# Altium PCB led_2835_rectangle_49point9X2point6cm.PcbDoc
Units mm, origin at the board's own origin, x right, y up, seen from the top; angles counter-clockwise.
Board outline 499 x 26 mm, 2 copper layers (Top Layer, Bottom Layer); 122 components, 96 nets, 244 pads, 0 vias.
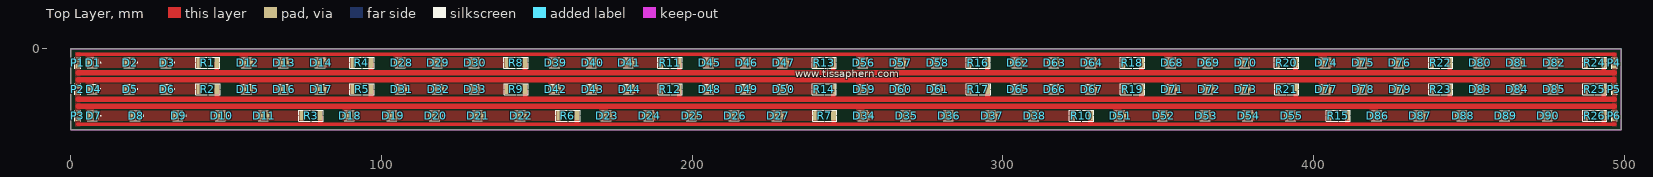
[diagram p0: Top Layer view]
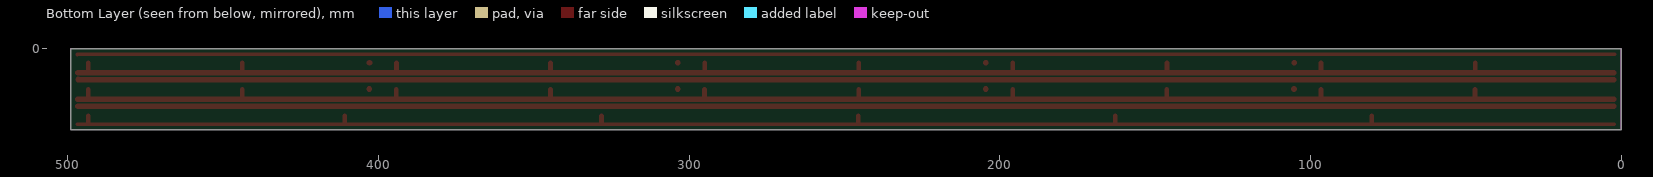
[diagram p1: Bottom Layer view, seen from below]

## Layer stack, top to bottom
Top Solder: solder mask 0.0102, Solder Resist, Dk 3.5
Top Layer: signal copper 0.0356
Dielectric 1: dielectric 0.32, FR-4, Dk 4.8
Bottom Layer: signal copper 0.0356
Bottom Solder: solder mask 0.0102, Solder Resist, Dk 3.5

## Board outline
0,-26 499,-26 499,0 0,0

## Design rules (kind name [scope] priority, off if disabled: settings)
Clearance [All] p1: gap=0.254 ignorepadtopadclearanceinfootprint=FALSE except(0: Arc-Hole Track-Hole SMDPad-Hole THPad-Hole Via-Hole Fill-Hole Poly-Hole Region-Hole Text-Hole)
PolygonConnect PolygonConnect_1 [All vs IsNamedPolygon('NONET_L-01_P-001')] p1: connectstyle=Direct reliefconductorwidth=0.254 reliefentries=4 polygonreliefangle="90 Angle" airgapwidth=0.254
PolygonConnect [All] p2: connectstyle=Relief reliefconductorwidth=0.254 reliefentries=4 polygonreliefangle="90 Angle" airgapwidth=0.254
RoutingVias [All] p1: holewidth=0.711 width=1.27 viastyle="Through Hole" minholewidth=0.711 minwidth=1.27 maxholewidth=0.711 maxwidth=1.27
SolderMaskExpansion [All] p1: expansion=0.102 istentingtop=FALSE
Width [All] p1: maxlimit=15 minlimit=0.254 preferedwidth=0.254
30 further rules are at their usual default settings.

## Components (designator, comment, footprint, x,y, rotation, side; value= is the part's Value field where it differs from the comment)
D1 "OF-SMD2835Y" LED_OF-SMD2835Y 4.49,-2.785 r180 top
D2 "OF-SMD2835Y" LED_OF-SMD2835Y 16.356,-2.785 r180 top
D3 "OF-SMD2835Y" LED_OF-SMD2835Y 28.222,-2.785 r180 top
D4 "OF-SMD2835Y" LED_OF-SMD2835Y 4.528,-11.253 r180 top
D5 "OF-SMD2835Y" LED_OF-SMD2835Y 16.394,-11.253 r180 top
D6 "OF-SMD2835Y" LED_OF-SMD2835Y 28.26,-11.253 r180 top
D7 "OF-SMD2835Y" LED_OF-SMD2835Y 4.553,-19.864 r180 top
D8 "OF-SMD2835Y" LED_OF-SMD2835Y 18.285,-19.864 r180 top
D9 "OF-SMD2835Y" LED_OF-SMD2835Y 32.017,-19.864 r180 top
D10 "OF-SMD2835Y" LED_OF-SMD2835Y 45.749,-19.864 r180 top
D11 "OF-SMD2835Y" LED_OF-SMD2835Y 59.535,-19.864 r180 top
D12 "OF-SMD2835Y" LED_OF-SMD2835Y 54.09,-2.785 r180 top
D13 "OF-SMD2835Y" LED_OF-SMD2835Y 65.956,-2.785 r180 top
D14 "OF-SMD2835Y" LED_OF-SMD2835Y 77.822,-2.785 r180 top
D15 "OF-SMD2835Y" LED_OF-SMD2835Y 54.128,-11.253 r180 top
D16 "OF-SMD2835Y" LED_OF-SMD2835Y 65.994,-11.253 r180 top
D17 "OF-SMD2835Y" LED_OF-SMD2835Y 77.86,-11.253 r180 top
D18 "OF-SMD2835Y" LED_OF-SMD2835Y 87.213,-19.864 r180 top
D19 "OF-SMD2835Y" LED_OF-SMD2835Y 100.945,-19.864 r180 top
D20 "OF-SMD2835Y" LED_OF-SMD2835Y 114.677,-19.864 r180 top
D21 "OF-SMD2835Y" LED_OF-SMD2835Y 128.409,-19.864 r180 top
D22 "OF-SMD2835Y" LED_OF-SMD2835Y 142.195,-19.864 r180 top
D23 "OF-SMD2835Y" LED_OF-SMD2835Y 169.873,-19.864 r180 top
D24 "OF-SMD2835Y" LED_OF-SMD2835Y 183.605,-19.864 r180 top
D25 "OF-SMD2835Y" LED_OF-SMD2835Y 197.337,-19.864 r180 top
D26 "OF-SMD2835Y" LED_OF-SMD2835Y 211.069,-19.864 r180 top
D27 "OF-SMD2835Y" LED_OF-SMD2835Y 224.855,-19.864 r180 top
D28 "OF-SMD2835Y" LED_OF-SMD2835Y 103.69,-2.785 r180 top
D29 "OF-SMD2835Y" LED_OF-SMD2835Y 115.556,-2.785 r180 top
D30 "OF-SMD2835Y" LED_OF-SMD2835Y 127.422,-2.785 r180 top
D31 "OF-SMD2835Y" LED_OF-SMD2835Y 103.728,-11.253 r180 top
D32 "OF-SMD2835Y" LED_OF-SMD2835Y 115.594,-11.253 r180 top
D33 "OF-SMD2835Y" LED_OF-SMD2835Y 127.46,-11.253 r180 top
D34 "OF-SMD2835Y" LED_OF-SMD2835Y 252.533,-19.864 r180 top
D35 "OF-SMD2835Y" LED_OF-SMD2835Y 266.265,-19.864 r180 top
D36 "OF-SMD2835Y" LED_OF-SMD2835Y 279.997,-19.864 r180 top
D37 "OF-SMD2835Y" LED_OF-SMD2835Y 293.729,-19.864 r180 top
D38 "OF-SMD2835Y" LED_OF-SMD2835Y 307.515,-19.864 r180 top
D39 "OF-SMD2835Y" LED_OF-SMD2835Y 153.29,-2.785 r180 top
D40 "OF-SMD2835Y" LED_OF-SMD2835Y 165.156,-2.785 r180 top
D41 "OF-SMD2835Y" LED_OF-SMD2835Y 177.022,-2.785 r180 top
D42 "OF-SMD2835Y" LED_OF-SMD2835Y 153.328,-11.253 r180 top
D43 "OF-SMD2835Y" LED_OF-SMD2835Y 165.194,-11.253 r180 top
D44 "OF-SMD2835Y" LED_OF-SMD2835Y 177.06,-11.253 r180 top
D45 "OF-SMD2835Y" LED_OF-SMD2835Y 202.89,-2.785 r180 top
D46 "OF-SMD2835Y" LED_OF-SMD2835Y 214.756,-2.785 r180 top
D47 "OF-SMD2835Y" LED_OF-SMD2835Y 226.622,-2.785 r180 top
D48 "OF-SMD2835Y" LED_OF-SMD2835Y 202.928,-11.253 r180 top
D49 "OF-SMD2835Y" LED_OF-SMD2835Y 214.794,-11.253 r180 top
D50 "OF-SMD2835Y" LED_OF-SMD2835Y 226.66,-11.253 r180 top
D51 "OF-SMD2835Y" LED_OF-SMD2835Y 335.193,-19.864 r180 top
D52 "OF-SMD2835Y" LED_OF-SMD2835Y 348.925,-19.864 r180 top
D53 "OF-SMD2835Y" LED_OF-SMD2835Y 362.657,-19.864 r180 top
D54 "OF-SMD2835Y" LED_OF-SMD2835Y 376.389,-19.864 r180 top
D55 "OF-SMD2835Y" LED_OF-SMD2835Y 390.175,-19.864 r180 top
D56 "OF-SMD2835Y" LED_OF-SMD2835Y 252.49,-2.785 r180 top
D57 "OF-SMD2835Y" LED_OF-SMD2835Y 264.356,-2.785 r180 top
D58 "OF-SMD2835Y" LED_OF-SMD2835Y 276.222,-2.785 r180 top
D59 "OF-SMD2835Y" LED_OF-SMD2835Y 252.528,-11.253 r180 top
D60 "OF-SMD2835Y" LED_OF-SMD2835Y 264.394,-11.253 r180 top
D61 "OF-SMD2835Y" LED_OF-SMD2835Y 276.26,-11.253 r180 top
D62 "OF-SMD2835Y" LED_OF-SMD2835Y 302.09,-2.785 r180 top
D63 "OF-SMD2835Y" LED_OF-SMD2835Y 313.956,-2.785 r180 top
D64 "OF-SMD2835Y" LED_OF-SMD2835Y 325.822,-2.785 r180 top
D65 "OF-SMD2835Y" LED_OF-SMD2835Y 302.128,-11.253 r180 top
D66 "OF-SMD2835Y" LED_OF-SMD2835Y 313.994,-11.253 r180 top
D67 "OF-SMD2835Y" LED_OF-SMD2835Y 325.86,-11.253 r180 top
D68 "OF-SMD2835Y" LED_OF-SMD2835Y 351.69,-2.785 r180 top
D69 "OF-SMD2835Y" LED_OF-SMD2835Y 363.556,-2.785 r180 top
D70 "OF-SMD2835Y" LED_OF-SMD2835Y 375.422,-2.785 r180 top
D71 "OF-SMD2835Y" LED_OF-SMD2835Y 351.728,-11.253 r180 top
D72 "OF-SMD2835Y" LED_OF-SMD2835Y 363.594,-11.253 r180 top
D73 "OF-SMD2835Y" LED_OF-SMD2835Y 375.46,-11.253 r180 top
D74 "OF-SMD2835Y" LED_OF-SMD2835Y 401.29,-2.785 r180 top
D75 "OF-SMD2835Y" LED_OF-SMD2835Y 413.156,-2.785 r180 top
D76 "OF-SMD2835Y" LED_OF-SMD2835Y 425.022,-2.785 r180 top
D77 "OF-SMD2835Y" LED_OF-SMD2835Y 401.328,-11.253 r180 top
D78 "OF-SMD2835Y" LED_OF-SMD2835Y 413.194,-11.253 r180 top
D79 "OF-SMD2835Y" LED_OF-SMD2835Y 425.06,-11.253 r180 top
D80 "OF-SMD2835Y" LED_OF-SMD2835Y 450.89,-2.785 r180 top
D81 "OF-SMD2835Y" LED_OF-SMD2835Y 462.756,-2.785 r180 top
D82 "OF-SMD2835Y" LED_OF-SMD2835Y 474.622,-2.785 r180 top
D83 "OF-SMD2835Y" LED_OF-SMD2835Y 450.928,-11.253 r180 top
D84 "OF-SMD2835Y" LED_OF-SMD2835Y 462.794,-11.253 r180 top
D85 "OF-SMD2835Y" LED_OF-SMD2835Y 474.66,-11.253 r180 top
D86 "OF-SMD2835Y" LED_OF-SMD2835Y 417.853,-19.864 r180 top
D87 "OF-SMD2835Y" LED_OF-SMD2835Y 431.585,-19.864 r180 top
D88 "OF-SMD2835Y" LED_OF-SMD2835Y 445.317,-19.864 r180 top
D89 "OF-SMD2835Y" LED_OF-SMD2835Y 459.049,-19.864 r180 top
D90 "OF-SMD2835Y" LED_OF-SMD2835Y 472.835,-19.864 r180 top
P1 "Header 2" HDR1X2_SMD 2.268,-4.55 r270 top
P2 "Header 2" HDR1X2_SMD 2.268,-13.018 r270 top
P3 "Header 2" HDR1X2_SMD 2.268,-21.58 r270 top
P4 "Header 2" HDR1X2_SMD 496.837,-4.55 r270 top
P5 "Header 2" HDR1X2_SMD 496.837,-13.018 r270 top
P6 "Header 2" HDR1X2_SMD 496.837,-21.558 r270 top
R1 "1K" R2512 40.088,-4.504 r0 top
R2 "1K" R2512 40.126,-12.972 r0 top
R3 "1K" R2512 73.327,-21.539 r0 top
R4 "1K" R2512 89.688,-4.504 r0 top
R5 "1K" R2512 89.726,-12.972 r0 top
R6 "1K" R2512 155.987,-21.539 r0 top
R7 "1K" R2512 238.647,-21.539 r0 top
R8 "1K" R2512 139.288,-4.504 r0 top
R9 "1K" R2512 139.326,-12.972 r0 top
R10 "1K" R2512 321.307,-21.539 r0 top
R11 "1K" R2512 188.888,-4.504 r0 top
R12 "1K" R2512 188.926,-12.972 r0 top
R13 "1K" R2512 238.488,-4.504 r0 top
R14 "1K" R2512 238.526,-12.972 r0 top
R15 "1K" R2512 403.967,-21.539 r0 top
R16 "1K" R2512 288.088,-4.504 r0 top
R17 "1K" R2512 288.126,-12.972 r0 top
R18 "1K" R2512 337.688,-4.504 r0 top
R19 "1K" R2512 337.726,-12.972 r0 top
R20 "1K" R2512 387.288,-4.504 r0 top
R21 "1K" R2512 387.326,-12.972 r0 top
R22 "1K" R2512 436.888,-4.504 r0 top
R23 "1K" R2512 436.926,-12.972 r0 top
R24 "1K" R2512 486.488,-4.504 r0 top
R25 "1K" R2512 486.526,-12.972 r0 top
R26 "1K" R2512 486.526,-21.539 r0 top

## Footprints (in the part's own frame and the unit in brackets; to place one, negate y for a bottom-side part, rotate by r counter-clockwise, add the part's x,y. Pads: shape width x height; smd on the part's side, far side on the other; paste and mask are expansions set on the pad)
HDR1X2_SMD [mm] "Connector; Header; 2 Position"
  rect 1.5x1.5 smd: GND(0.955,0.004) VCC(-0.955,-0.004)
  silkscreen extent -1.81,-0.94 1.81,0.94
LED_OF-SMD2835Y [mm]
  rect 2.6x2.55 smd: A(-1.575,1.675)
  rect 1x2.55 smd: C(-3.975,1.675)
  silkscreen extent -5.18,0.08 -0.73,3.27
R2512 [mm] "CHIP RESISTOR 1 WATT, 6.4X3.2mm, 2512, 6432"
  rrect50% 1.6x3.2 smd: 1(1.1,0) 2(6.9,0)
  Top Layer pour cut-out: 1.6,1.9 6.4,1.9 6.4,-1.9 1.6,-1.9
  silkscreen extent 0.1,-1.8 7.9,1.8, body extent 0.83,-1.5 7.18,1.5, height 1.6

## Part data
D1 D2 D3 D4 D5 D6 D7 D8 D9 D10 D11 D12 D13 D14 D15 D16 D17 D18 D19 D20 D21 D22 D23 D24 D25 D26 D27 D28 D29 D30 D31 D32 D33 D34 D35 D36 D37 D38 D39 D40 D41 D42 D43 D44 D45 D46 D47 D48 D49 D50 D51 D52 D53 D54 D55 D56 D57 D58 D59 D60 D61 D62 D63 D64 D65 D66 D67 D68 D69 D70 D71 D72 D73 D74 D75 D76 D77 D78 D79 D80 D81 D82 D83 D84 D85 D86 D87 D88 D89 D90: "LED; SMD; 2835, PLCC2; yellow; 2200-2800mcd; 2.8x3.5x0.75mm; 120Â°", Package=None, Availability=Unavailable, MP=OF-SMD2835Y, Price=None
P1 P2 P3 P4 P5 P6: "Header, 2-Pin", LatestRevisionDate=17-Jul-2002, LatestRevisionNote="Re-released for DXP Platform.", Publisher="Altium Limited"
R1 R2 R3 R4 R5 R6 R7 R8 R9 R10 R11 R12 R13 R14 R15 R16 R17 R18 R19 R20 R21 R22 R23 R24 R25 R26: library part Res1, "Resistor", LatestRevisionDate=17-Jul-2002, LatestRevisionNote="Re-released for DXP Platform.", PackageDescription="Axial Device, Thru-Hole; 2 Leads; 0.3 in Pin Spacing", PackageReference=AXIAL-0.3, Published=8-Jun-2000, Publisher="Altium Limited"

## Nets (pads, with @x,y where several pads share a name; then routed paths per layer and width w, separated by ;. In a path a pad name is that pad's centre, name@x,y a point inside that pad or via, vN(x,y) a via of type N, cw(c..) or ccw(c..) an arc to the next point about the centre after c; other vN are vias at no path point)
FIRST_GND: P1.GND P4.GND R1.2 R4.2 R8.2 R11.2 R13.2 R16.2 R18.2 R20.2 R22.2 R24.2 | length 526.2
  Top Layer w1.5: 46.988,-7.696 R1.2 ; 96.588,-7.696 R4.2 ; 146.188,-7.696 R8.2 ; 195.788,-7.696 R11.2 ; 245.388,-7.696 R13.2 ; 294.988,-7.696 R16.2 ; 344.588,-7.696 R18.2 ; 394.188,-7.696 R20.2 ; R22.2 443.788,-7.696 443.796,-7.704 ; 493.388,-7.696 R24.2
  Top Layer w1.8: 2.415,-7.704 41.786,-7.704 443.796,-7.704 496.704,-7.704 496.704,-7.71
FIRST_VCC: D1.A D12.A D28.A D39.A D45.A D56.A D62.A D68.A D74.A D80.A P1.VCC P4.VCC | length 494.9
  Top Layer w1.2: 2.148,-1.731 496.954,-1.84
  Top Layer w1.8: D28.A D28.A@105.28,-4.445 ; D45.A D45.A@204.48,-4.445 ; D62.A D62.A@303.68,-4.445 ; D74.A D74.A@402.88,-4.445
NetD1_C: D1.C D2.A
NetD2_C: D2.C D3.A
NetD3_C: D3.C R1.1
NetD4_C: D4.C D5.A
NetD5_C: D5.C D6.A
NetD6_C: D6.C R2.1
NetD7_C: D7.C D8.A
NetD8_C: D8.C D9.A
NetD9_C: D9.C D10.A
NetD10_C: D10.C D11.A
NetD11_C: D11.C R3.1
NetD12_C: D12.C D13.A
NetD13_C: D13.C D14.A
NetD14_C: D14.C R4.1
NetD15_C: D15.C D16.A
NetD16_C: D16.C D17.A
NetD17_C: D17.C R5.1
NetD18_C: D18.C D19.A
NetD19_C: D19.C D20.A
NetD20_C: D20.C D21.A
NetD21_C: D21.C D22.A
NetD22_C: D22.C R6.1
NetD23_C: D23.C D24.A
NetD24_C: D24.C D25.A
NetD25_C: D25.C D26.A
NetD26_C: D26.C D27.A
NetD27_C: D27.C R7.1
NetD28_C: D28.C D29.A
NetD29_C: D29.C D30.A
NetD30_C: D30.C R8.1
NetD31_C: D31.C D32.A
NetD32_C: D32.C D33.A
NetD33_C: D33.C R9.1
NetD34_C: D34.C D35.A
NetD35_C: D35.C D36.A
NetD36_C: D36.C D37.A
NetD37_C: D37.C D38.A
NetD38_C: D38.C R10.1
NetD39_C: D39.C D40.A
NetD40_C: D40.C D41.A
NetD41_C: D41.C R11.1
NetD42_C: D42.C D43.A
NetD43_C: D43.C D44.A
NetD44_C: D44.C R12.1
NetD45_C: D45.C D46.A
NetD46_C: D46.C D47.A
NetD47_C: D47.C R13.1
NetD48_C: D48.C D49.A
NetD49_C: D49.C D50.A
NetD50_C: D50.C R14.1
NetD51_C: D51.C D52.A
NetD52_C: D52.C D53.A
NetD53_C: D53.C D54.A
NetD54_C: D54.C D55.A
NetD55_C: D55.C R15.1
NetD56_C: D56.C D57.A
NetD57_C: D57.C D58.A
NetD58_C: D58.C R16.1
NetD59_C: D59.C D60.A
NetD60_C: D60.C D61.A
NetD61_C: D61.C R17.1
NetD62_C: D62.C D63.A
NetD63_C: D63.C D64.A
NetD64_C: D64.C R18.1
NetD65_C: D65.C D66.A
NetD66_C: D66.C D67.A
NetD67_C: D67.C R19.1
NetD68_C: D68.C D69.A
NetD69_C: D69.C D70.A
NetD70_C: D70.C R20.1
NetD71_C: D71.C D72.A
NetD72_C: D72.C D73.A
NetD73_C: D73.C R21.1
NetD74_C: D74.C D75.A
NetD75_C: D75.C D76.A
NetD76_C: D76.C R22.1
NetD77_C: D77.C D78.A
NetD78_C: D78.C D79.A
NetD79_C: D79.C R23.1
NetD80_C: D80.C D81.A
NetD81_C: D81.C D82.A
NetD82_C: D82.C R24.1
NetD83_C: D83.C D84.A
NetD84_C: D84.C D85.A
NetD85_C: D85.C R25.1
NetD86_C: D86.C D87.A
NetD87_C: D87.C D88.A
NetD88_C: D88.C D89.A
NetD89_C: D89.C D90.A
NetD90_C: D90.C R26.1
SECOND_GND: P2.GND P5.GND R2.2 R5.2 R9.2 R12.2 R14.2 R17.2 R19.2 R21.2 R23.2 R25.2 | length 526.2
  Top Layer w1.5: 47.026,-16.164 R2.2 ; 96.626,-16.164 R5.2 ; 146.226,-16.164 R9.2 ; 195.826,-16.164 R12.2 ; 245.426,-16.164 R14.2 ; 295.026,-16.164 R17.2 ; 344.626,-16.164 R19.2 ; 394.226,-16.164 R21.2 ; 443.826,-16.164 R23.2 ; 493.426,-16.164 R25.2
  Top Layer w1.8: 2.451,-16.255 47.026,-16.255 96.626,-16.255 146.226,-16.255 195.826,-16.255 245.426,-16.255 295.026,-16.255 344.626,-16.255 394.226,-16.255 443.826,-16.255 494.096,-16.255 496.722,-16.255
SECOND_VCC: D4.A D15.A D31.A D42.A D48.A D59.A D65.A D71.A D77.A D83.A P2.VCC P5.VCC | length 494.3
  Top Layer w1.8: 2.427,-9.911 496.664,-9.871 ; D31.A D31.A@105.318,-12.913 ; D48.A D48.A@204.518,-12.913 ; D65.A D65.A@303.718,-12.913 ; D77.A D77.A@402.918,-12.913
THIRD_GND: P3.GND P6.GND R3.2 R6.2 R7.2 R10.2 R15.2 R26.2 | length 509.7
  Top Layer w1.2: 2.192,-24.281 80.227,-24.281 162.887,-24.281 245.547,-24.281 328.207,-24.281 410.867,-24.281 493.426,-24.281 496.939,-24.281
  Top Layer w1.5: 80.227,-24.037 R3.2 ; 162.887,-24.037 R6.2 ; 245.547,-24.037 R7.2 ; 328.207,-24.037 R10.2 ; 410.867,-24.037 R15.2 ; 493.426,-24.037 R26.2
THIRD_VCC: D7.A D18.A D23.A D34.A D51.A D86.A P3.VCC P6.VCC | length 494.3
  Top Layer w1.8: 2.429,-18.441 496.682,-18.445

## Polygon pours and split planes (outlines as drawn)
THIRD_GND on Top Layer "NONET_L-01_P-001" (solid, remove dead copper, pour order 296): 497.615,-21.747 496.066,-21.747 496.066,-24.876 497.62,-24.876
THIRD_VCC on Top Layer "NONET_L-01_P-001" (solid, remove dead copper, pour order 295): 496.059,-21.369 497.608,-21.369 497.608,-17.549 496.053,-17.549
SECOND_GND on Top Layer "NONET_L-01_P-001" (solid, remove dead copper, pour order 294): 497.615,-13.207 496.066,-13.207 496.066,-17.153 497.621,-17.153
SECOND_VCC on Top Layer "NONET_L-01_P-001" (solid, remove dead copper, pour order 293): 496.059,-12.829 497.608,-12.829 497.608,-8.985 496.053,-8.985
FIRST_GND on Top Layer "NONET_L-01_P-001" (solid, remove dead copper, pour order 291): 497.615,-4.739 496.066,-4.739 496.066,-8.603 497.621,-8.603
FIRST_VCC on Top Layer "NONET_L-01_P-001" (solid, remove dead copper, pour order 292): 496.059,-4.361 497.608,-4.361 497.608,-1.251 496.827,-1.24 496.054,-1.251
FIRST_VCC on Top Layer "NONET_L-01_P-001" (solid, remove dead copper, pour order 286): 1.49,-4.371 3.039,-4.371 3.039,-1.135 1.485,-1.135
THIRD_GND on Top Layer "NONET_L-01_P-001" (solid, remove dead copper, pour order 290): 3.046,-21.788 1.497,-21.788 1.497,-24.877 3.051,-24.877
THIRD_VCC on Top Layer "NONET_L-01_P-001" (solid, remove dead copper, pour order 289): 1.49,-21.372 3.039,-21.372 3.039,-17.547 1.484,-17.547
SECOND_GND on Top Layer "NONET_L-01_P-001" (solid, remove dead copper, pour order 288): 3.046,-13.226 1.497,-13.226 1.497,-17.151 3.052,-17.151
SECOND_VCC on Top Layer "NONET_L-01_P-001" (solid, remove dead copper, pour order 287): 1.49,-12.81 3.039,-12.81 3.039,-9.015 1.484,-9.015
FIRST_GND on Top Layer "NONET_L-01_P-001" (solid, remove dead copper, pour order 285): 3.046,-4.671 1.497,-4.671 1.497,-8.603 3.052,-8.603
FIRST_VCC on Top Layer "NONET_L-01_P-001" (solid, remove dead copper, pour order 94): 203.174,-6.082 203.174,-1.741 205.784,-1.741 205.784,-6.093 203.185,-6.093
NetD90_C on Top Layer "NONET_L-01_P-001" (solid, remove dead copper, pour order 268): 476.311,-20.264 476.311,-19.868 488.227,-19.868 488.227,-23.199 476.319,-23.199 476.314,-23.194
NetD55_C on Top Layer "NONET_L-01_P-001" (solid, remove dead copper, pour order 266): 393.651,-20.264 393.651,-19.868 405.567,-19.868 405.567,-23.199 393.659,-23.199 393.654,-23.194
NetD38_C on Top Layer "NONET_L-01_P-001" (solid, remove dead copper, pour order 265): 310.991,-20.264 310.991,-19.868 322.907,-19.868 322.907,-23.199 310.999,-23.199 310.994,-23.194
NetD27_C on Top Layer "NONET_L-01_P-001" (solid, remove dead copper, pour order 264): 228.331,-20.264 228.331,-19.868 240.247,-19.868 240.247,-23.199 228.339,-23.199 228.334,-23.194
NetD22_C on Top Layer "NONET_L-01_P-001" (solid, remove dead copper, pour order 263): 145.671,-20.264 145.671,-19.868 157.587,-19.868 157.587,-23.199 145.679,-23.199 145.674,-23.194
NetD89_C on Top Layer "NONET_L-01_P-001" (solid, remove dead copper, pour order 261): 462.525,-20.264 462.525,-19.868 475.664,-19.868 475.664,-23.199 462.533,-23.199 462.528,-23.194
NetD88_C on Top Layer "NONET_L-01_P-001" (solid, remove dead copper, pour order 260): 448.793,-20.264 448.793,-19.868 461.932,-19.868 461.932,-23.199 448.801,-23.199 448.796,-23.194
NetD87_C on Top Layer "NONET_L-01_P-001" (solid, remove dead copper, pour order 259): 435.061,-20.264 435.061,-19.868 448.2,-19.868 448.2,-23.199 435.069,-23.199 435.064,-23.194
NetD86_C on Top Layer "NONET_L-01_P-001" (solid, remove dead copper, pour order 258): 421.329,-20.264 421.329,-19.868 434.468,-19.868 434.468,-23.199 421.337,-23.199 421.332,-23.194
NetD54_C on Top Layer "NONET_L-01_P-001" (solid, remove dead copper, pour order 257): 379.865,-20.264 379.865,-19.868 393.004,-19.868 393.004,-23.199 379.873,-23.199 379.868,-23.194
NetD53_C on Top Layer "NONET_L-01_P-001" (solid, remove dead copper, pour order 256): 366.133,-20.264 366.133,-19.868 379.272,-19.868 379.272,-23.199 366.141,-23.199 366.136,-23.194
NetD52_C on Top Layer "NONET_L-01_P-001" (solid, remove dead copper, pour order 255): 352.401,-20.264 352.401,-19.868 365.54,-19.868 365.54,-23.199 352.409,-23.199 352.404,-23.194
NetD51_C on Top Layer "NONET_L-01_P-001" (solid, remove dead copper, pour order 254): 338.669,-20.264 338.669,-19.868 351.808,-19.868 351.808,-23.199 338.677,-23.199 338.672,-23.194
NetD37_C on Top Layer "NONET_L-01_P-001" (solid, remove dead copper, pour order 253): 297.205,-20.264 297.205,-19.868 310.344,-19.868 310.344,-23.199 297.213,-23.199 297.208,-23.194
NetD36_C on Top Layer "NONET_L-01_P-001" (solid, remove dead copper, pour order 252): 283.473,-20.264 283.473,-19.868 296.612,-19.868 296.612,-23.199 283.481,-23.199 283.476,-23.194
NetD35_C on Top Layer "NONET_L-01_P-001" (solid, remove dead copper, pour order 251): 269.741,-20.264 269.741,-19.868 282.88,-19.868 282.88,-23.199 269.749,-23.199 269.744,-23.194
NetD34_C on Top Layer "NONET_L-01_P-001" (solid, remove dead copper, pour order 250): 256.009,-20.264 256.009,-19.868 269.148,-19.868 269.148,-23.199 256.017,-23.199 256.012,-23.194
NetD26_C on Top Layer "NONET_L-01_P-001" (solid, remove dead copper, pour order 249): 214.545,-20.264 214.545,-19.868 227.684,-19.868 227.684,-23.199 214.553,-23.199 214.548,-23.194
NetD25_C on Top Layer "NONET_L-01_P-001" (solid, remove dead copper, pour order 248): 200.813,-20.264 200.813,-19.868 213.952,-19.868 213.952,-23.199 200.821,-23.199 200.816,-23.194
NetD24_C on Top Layer "NONET_L-01_P-001" (solid, remove dead copper, pour order 247): 187.081,-20.264 187.081,-19.868 200.22,-19.868 200.22,-23.199 187.089,-23.199 187.084,-23.194
NetD23_C on Top Layer "NONET_L-01_P-001" (solid, remove dead copper, pour order 245): 173.349,-20.264 173.349,-19.868 186.488,-19.868 186.488,-23.199 173.357,-23.199 173.352,-23.194
NetD21_C on Top Layer "NONET_L-01_P-001" (solid, remove dead copper, pour order 244): 131.713,-20.375 131.713,-19.979 144.852,-19.979 144.852,-23.31 131.721,-23.31 131.716,-23.305
NetD20_C on Top Layer "NONET_L-01_P-001" (solid, remove dead copper, pour order 243): 118.153,-20.264 118.153,-19.868 131.292,-19.868 131.292,-23.199 118.161,-23.199 118.156,-23.194
NetD19_C on Top Layer "NONET_L-01_P-001" (solid, remove dead copper, pour order 242): 104.421,-20.264 104.421,-19.868 117.56,-19.868 117.56,-23.199 104.429,-23.199 104.424,-23.194
NetD18_C on Top Layer "NONET_L-01_P-001" (solid, remove dead copper, pour order 240): 90.689,-20.264 90.689,-19.868 103.828,-19.868 103.828,-23.199 90.697,-23.199 90.692,-23.194
THIRD_VCC on Top Layer "NONET_L-01_P-001" (solid, remove dead copper, pour order 228): 4.833,-21.764 4.838,-21.759 4.838,-18.23 7.421,-18.23 7.432,-18.241 7.432,-23.187 4.833,-23.187 4.822,-23.176
THIRD_VCC on Top Layer "NONET_L-01_P-001" (solid, remove dead copper, pour order 230): 87.493,-21.764 87.498,-21.759 87.498,-18.23 90.081,-18.23 90.092,-18.241 90.092,-23.187 87.493,-23.187 87.482,-23.176
THIRD_VCC on Top Layer "NONET_L-01_P-001" (solid, remove dead copper, pour order 231): 170.153,-21.764 170.158,-21.759 170.158,-18.23 172.741,-18.23 172.752,-18.241 172.752,-23.187 170.153,-23.187 170.142,-23.176
THIRD_VCC on Top Layer "NONET_L-01_P-001" (solid, remove dead copper, pour order 232): 252.813,-21.764 252.818,-21.759 252.818,-18.23 255.401,-18.23 255.412,-18.241 255.412,-23.187 252.813,-23.187 252.802,-23.176
THIRD_VCC on Top Layer "NONET_L-01_P-001" (solid, remove dead copper, pour order 233): 335.473,-21.764 335.478,-21.759 335.478,-18.23 338.061,-18.23 338.072,-18.241 338.072,-23.187 335.473,-23.187 335.462,-23.176
THIRD_VCC on Top Layer "NONET_L-01_P-001" (solid, remove dead copper, pour order 234): 418.133,-21.764 418.138,-21.759 418.138,-18.23 420.721,-18.23 420.732,-18.241 420.732,-23.187 418.133,-23.187 418.122,-23.176
NetD7_C on Top Layer "NONET_L-01_P-001" (solid, remove dead copper, pour order 235): 8.029,-20.264 8.029,-19.868 21.168,-19.868 21.168,-23.199 8.037,-23.199 8.032,-23.194
NetD8_C on Top Layer "NONET_L-01_P-001" (solid, remove dead copper, pour order 236): 21.761,-20.264 21.761,-19.868 34.9,-19.868 34.9,-23.199 21.769,-23.199 21.764,-23.194
NetD9_C on Top Layer "NONET_L-01_P-001" (solid, remove dead copper, pour order 237): 35.493,-20.264 35.493,-19.868 48.632,-19.868 48.632,-23.199 35.501,-23.199 35.496,-23.194
NetD10_C on Top Layer "NONET_L-01_P-001" (solid, remove dead copper, pour order 238): 49.225,-20.264 49.225,-19.868 62.364,-19.868 62.364,-23.199 49.233,-23.199 49.228,-23.194
NetD11_C on Top Layer "NONET_L-01_P-001" (solid, remove dead copper, pour order 239): 63.011,-20.264 63.011,-19.868 74.927,-19.868 74.927,-23.199 63.019,-23.199 63.014,-23.194
SECOND_VCC on Top Layer "NONET_L-01_P-001" (solid, remove dead copper, pour order 225): 451.208,-13.153 451.213,-13.148 451.213,-9.619 453.796,-9.619 453.807,-9.63 453.807,-14.576 451.208,-14.576 451.197,-14.565
SECOND_VCC on Top Layer "NONET_L-01_P-001" (solid, remove dead copper, pour order 224): 401.623,-13.138 401.628,-13.133 401.628,-9.604 404.211,-9.604 404.222,-9.615 404.222,-14.561 401.623,-14.561 401.612,-14.55
SECOND_VCC on Top Layer "NONET_L-01_P-001" (solid, remove dead copper, pour order 223): 352.008,-13.153 352.013,-13.148 352.013,-9.619 354.596,-9.619 354.607,-9.63 354.607,-14.576 352.008,-14.576 351.997,-14.565
SECOND_VCC on Top Layer "NONET_L-01_P-001" (solid, remove dead copper, pour order 222): 302.408,-13.153 302.413,-13.148 302.413,-9.619 304.996,-9.619 305.007,-9.63 305.007,-14.576 302.408,-14.576 302.397,-14.565
SECOND_VCC on Top Layer "NONET_L-01_P-001" (solid, remove dead copper, pour order 221): 252.808,-13.153 252.813,-13.148 252.813,-9.619 255.396,-9.619 255.407,-9.63 255.407,-14.576 252.808,-14.576 252.797,-14.565
SECOND_VCC on Top Layer "NONET_L-01_P-001" (solid, remove dead copper, pour order 220): 203.223,-13.138 203.228,-13.133 203.228,-9.604 205.811,-9.604 205.822,-9.615 205.822,-14.561 203.223,-14.561 203.212,-14.55
SECOND_VCC on Top Layer "NONET_L-01_P-001" (solid, remove dead copper, pour order 219): 153.608,-13.153 153.613,-13.148 153.613,-9.619 156.196,-9.619 156.207,-9.63 156.207,-14.576 153.608,-14.576 153.597,-14.565
SECOND_VCC on Top Layer "NONET_L-01_P-001" (solid, remove dead copper, pour order 218): 104.023,-13.138 104.028,-13.133 104.028,-9.604 106.611,-9.604 106.622,-9.615 106.622,-14.561 104.023,-14.561 104.012,-14.55
SECOND_VCC on Top Layer "NONET_L-01_P-001" (solid, remove dead copper, pour order 217): 54.408,-13.153 54.413,-13.148 54.413,-9.619 56.996,-9.619 57.007,-9.63 57.007,-14.576 54.408,-14.576 54.397,-14.565
SECOND_VCC on Top Layer "NONET_L-01_P-001" (solid, remove dead copper, pour order 216): 4.808,-13.153 4.813,-13.148 4.813,-9.619 7.396,-9.619 7.407,-9.63 7.407,-14.576 4.808,-14.576 4.797,-14.565
NetD85_C on Top Layer "NONET_L-01_P-001" (solid, remove dead copper, pour order 215): 478.136,-11.653 478.136,-11.257 488.126,-11.257 488.126,-14.588 478.144,-14.588 478.139,-14.583
NetD84_C on Top Layer "NONET_L-01_P-001" (solid, remove dead copper, pour order 214): 466.27,-11.653 466.27,-11.257 477.531,-11.257 477.55,-11.276 477.55,-14.588 466.278,-14.588 466.273,-14.583
NetD83_C on Top Layer "NONET_L-01_P-001" (solid, remove dead copper, pour order 213): 454.404,-11.653 454.404,-11.257 465.665,-11.257 465.684,-11.276 465.684,-14.588 454.412,-14.588 454.407,-14.583
NetD79_C on Top Layer "NONET_L-01_P-001" (solid, remove dead copper, pour order 212): 428.536,-11.653 428.536,-11.257 438.526,-11.257 438.526,-14.588 428.544,-14.588 428.539,-14.583
NetD78_C on Top Layer "NONET_L-01_P-001" (solid, remove dead copper, pour order 211): 416.67,-11.653 416.67,-11.257 427.931,-11.257 427.95,-11.276 427.95,-14.588 416.678,-14.588 416.673,-14.583
NetD77_C on Top Layer "NONET_L-01_P-001" (solid, remove dead copper, pour order 210): 404.804,-11.653 404.804,-11.257 416.065,-11.257 416.084,-11.276 416.084,-14.588 404.812,-14.588 404.807,-14.583
NetD73_C on Top Layer "NONET_L-01_P-001" (solid, remove dead copper, pour order 209): 378.936,-11.653 378.936,-11.257 388.926,-11.257 388.926,-14.588 378.944,-14.588 378.939,-14.583
NetD72_C on Top Layer "NONET_L-01_P-001" (solid, remove dead copper, pour order 208): 367.07,-11.653 367.07,-11.257 378.331,-11.257 378.35,-11.276 378.35,-14.588 367.078,-14.588 367.073,-14.583
NetD71_C on Top Layer "NONET_L-01_P-001" (solid, remove dead copper, pour order 207): 355.204,-11.653 355.204,-11.257 366.465,-11.257 366.484,-11.276 366.484,-14.588 355.212,-14.588 355.207,-14.583
NetD67_C on Top Layer "NONET_L-01_P-001" (solid, remove dead copper, pour order 206): 329.336,-11.653 329.336,-11.257 339.326,-11.257 339.326,-14.588 329.344,-14.588 329.339,-14.583
NetD66_C on Top Layer "NONET_L-01_P-001" (solid, remove dead copper, pour order 205): 317.47,-11.653 317.47,-11.257 328.731,-11.257 328.75,-11.276 328.75,-14.588 317.478,-14.588 317.473,-14.583
NetD65_C on Top Layer "NONET_L-01_P-001" (solid, remove dead copper, pour order 204): 305.604,-11.653 305.604,-11.257 316.865,-11.257 316.884,-11.276 316.884,-14.588 305.612,-14.588 305.607,-14.583
NetD61_C on Top Layer "NONET_L-01_P-001" (solid, remove dead copper, pour order 203): 279.736,-11.653 279.736,-11.257 289.726,-11.257 289.726,-14.588 279.744,-14.588 279.739,-14.583
NetD60_C on Top Layer "NONET_L-01_P-001" (solid, remove dead copper, pour order 202): 267.87,-11.653 267.87,-11.257 279.131,-11.257 279.15,-11.276 279.15,-14.588 267.878,-14.588 267.873,-14.583
NetD59_C on Top Layer "NONET_L-01_P-001" (solid, remove dead copper, pour order 201): 256.004,-11.653 256.004,-11.257 267.265,-11.257 267.284,-11.276 267.284,-14.588 256.012,-14.588 256.007,-14.583
NetD50_C on Top Layer "NONET_L-01_P-001" (solid, remove dead copper, pour order 200): 230.136,-11.653 230.136,-11.257 240.126,-11.257 240.126,-14.588 230.144,-14.588 230.139,-14.583
NetD49_C on Top Layer "NONET_L-01_P-001" (solid, remove dead copper, pour order 199): 218.27,-11.653 218.27,-11.257 229.531,-11.257 229.55,-11.276 229.55,-14.588 218.278,-14.588 218.273,-14.583
NetD48_C on Top Layer "NONET_L-01_P-001" (solid, remove dead copper, pour order 198): 206.404,-11.653 206.404,-11.257 217.665,-11.257 217.684,-11.276 217.684,-14.588 206.412,-14.588 206.407,-14.583
NetD44_C on Top Layer "NONET_L-01_P-001" (solid, remove dead copper, pour order 197): 180.536,-11.653 180.536,-11.257 190.526,-11.257 190.526,-14.588 180.544,-14.588 180.539,-14.583
NetD43_C on Top Layer "NONET_L-01_P-001" (solid, remove dead copper, pour order 196): 168.67,-11.653 168.67,-11.257 179.931,-11.257 179.95,-11.276 179.95,-14.588 168.678,-14.588 168.673,-14.583
NetD42_C on Top Layer "NONET_L-01_P-001" (solid, remove dead copper, pour order 195): 156.804,-11.653 156.804,-11.257 168.065,-11.257 168.084,-11.276 168.084,-14.588 156.812,-14.588 156.807,-14.583
NetD33_C on Top Layer "NONET_L-01_P-001" (solid, remove dead copper, pour order 194): 130.936,-11.653 130.936,-11.257 140.926,-11.257 140.926,-14.588 130.944,-14.588 130.939,-14.583
NetD32_C on Top Layer "NONET_L-01_P-001" (solid, remove dead copper, pour order 193): 119.07,-11.653 119.07,-11.257 130.331,-11.257 130.35,-11.276 130.35,-14.588 119.078,-14.588 119.073,-14.583
NetD31_C on Top Layer "NONET_L-01_P-001" (solid, remove dead copper, pour order 192): 107.204,-11.653 107.204,-11.257 118.465,-11.257 118.484,-11.276 118.484,-14.588 107.212,-14.588 107.207,-14.583
NetD17_C on Top Layer "NONET_L-01_P-001" (solid, remove dead copper, pour order 191): 81.336,-11.653 81.336,-11.257 91.326,-11.257 91.326,-14.588 81.344,-14.588 81.339,-14.583
NetD16_C on Top Layer "NONET_L-01_P-001" (solid, remove dead copper, pour order 190): 69.47,-11.653 69.47,-11.257 80.731,-11.257 80.75,-11.276 80.75,-14.588 69.478,-14.588 69.473,-14.583
NetD15_C on Top Layer "NONET_L-01_P-001" (solid, remove dead copper, pour order 189): 57.604,-11.653 57.604,-11.257 68.865,-11.257 68.884,-11.276 68.884,-14.588 57.612,-14.588 57.607,-14.583
NetD6_C on Top Layer "NONET_L-01_P-001" (solid, remove dead copper, pour order 188): 31.736,-11.653 31.736,-11.257 41.726,-11.257 41.726,-14.588 31.744,-14.588 31.739,-14.583
NetD5_C on Top Layer "NONET_L-01_P-001" (solid, remove dead copper, pour order 187): 19.87,-11.653 19.87,-11.257 31.131,-11.257 31.15,-11.276 31.15,-14.588 19.878,-14.588 19.873,-14.583
NetD4_C on Top Layer "NONET_L-01_P-001" (solid, remove dead copper, pour order 186): 8.004,-11.653 8.004,-11.257 19.265,-11.257 19.284,-11.276 19.284,-14.588 8.012,-14.588 8.007,-14.583
FIRST_VCC on Top Layer "NONET_L-01_P-001" (solid, remove dead copper, pour order 99): 451.17,-4.685 451.17,-1.722 453.769,-1.722 453.769,-6.108 451.17,-6.108 451.159,-6.097
FIRST_VCC on Top Layer "NONET_L-01_P-001" (solid, remove dead copper, pour order 98): 401.46,-6.093 401.46,-1.75 404.184,-1.75 404.184,-6.093
FIRST_VCC on Top Layer "NONET_L-01_P-001" (solid, remove dead copper, pour order 97): 351.97,-4.685 351.975,-4.68 351.975,-1.683 354.569,-1.683 354.569,-6.108 351.97,-6.108 351.959,-6.097
FIRST_VCC on Top Layer "NONET_L-01_P-001" (solid, remove dead copper, pour order 96): 302.37,-4.685 302.375,-4.68 302.375,-1.554 304.969,-1.554 304.969,-6.108 302.37,-6.108 302.359,-6.097
FIRST_VCC on Top Layer "NONET_L-01_P-001" (solid, remove dead copper, pour order 95): 252.77,-4.685 252.775,-4.68 252.775,-1.594 255.369,-1.594 255.369,-6.108 252.77,-6.108 252.759,-6.097
FIRST_VCC on Top Layer "NONET_L-01_P-001" (solid, remove dead copper, pour order 93): 153.57,-4.685 153.57,-1.563 156.169,-1.563 156.169,-6.108 153.57,-6.108 153.559,-6.097
FIRST_VCC on Top Layer "NONET_L-01_P-001" (solid, remove dead copper, pour order 92): 103.985,-4.67 103.985,-1.439 106.584,-1.439 106.584,-6.093 103.985,-6.093 103.974,-6.082
FIRST_VCC on Top Layer "NONET_L-01_P-001" (solid, remove dead copper, pour order 91): 54.37,-4.685 54.375,-4.68 54.375,-1.56 56.969,-1.56 56.969,-6.108 54.37,-6.108 54.359,-6.097
FIRST_VCC on Top Layer "NONET_L-01_P-001" (solid, remove dead copper, pour order 90): 4.77,-4.685 4.775,-4.68 4.775,-1.558 7.369,-1.558 7.369,-6.108 4.77,-6.108 4.759,-6.097
NetD82_C on Top Layer "NONET_L-01_P-001" (solid, remove dead copper, pour order 29): 478.098,-3.185 478.098,-2.789 488.088,-2.789 488.088,-6.12 478.106,-6.12 478.101,-6.115
NetD81_C on Top Layer "NONET_L-01_P-001" (solid, remove dead copper, pour order 28): 466.232,-3.185 466.232,-2.789 477.493,-2.789 477.512,-2.808 477.512,-6.12 466.24,-6.12 466.235,-6.115
NetD80_C on Top Layer "NONET_L-01_P-001" (solid, remove dead copper, pour order 27): 454.366,-3.185 454.366,-2.789 465.627,-2.789 465.646,-2.808 465.646,-6.12 454.374,-6.12 454.369,-6.115
NetD76_C on Top Layer "NONET_L-01_P-001" (solid, remove dead copper, pour order 26): 428.498,-3.185 428.498,-2.789 438.488,-2.789 438.488,-6.12 428.506,-6.12 428.501,-6.115
NetD75_C on Top Layer "NONET_L-01_P-001" (solid, remove dead copper, pour order 25): 416.632,-3.185 416.632,-2.789 427.893,-2.789 427.912,-2.808 427.912,-6.12 416.64,-6.12 416.635,-6.115
NetD74_C on Top Layer "NONET_L-01_P-001" (solid, remove dead copper, pour order 24): 404.766,-3.185 404.766,-2.789 416.027,-2.789 416.046,-2.808 416.046,-6.12 404.774,-6.12 404.769,-6.115
NetD70_C on Top Layer "NONET_L-01_P-001" (solid, remove dead copper, pour order 23): 378.898,-3.185 378.898,-2.789 388.888,-2.789 388.888,-6.12 378.906,-6.12 378.901,-6.115
NetD69_C on Top Layer "NONET_L-01_P-001" (solid, remove dead copper, pour order 22): 367.032,-3.185 367.032,-2.789 378.293,-2.789 378.312,-2.808 378.312,-6.12 367.04,-6.12 367.035,-6.115
NetD68_C on Top Layer "NONET_L-01_P-001" (solid, remove dead copper, pour order 21): 355.166,-3.185 355.166,-2.789 366.427,-2.789 366.446,-2.808 366.446,-6.12 355.174,-6.12 355.169,-6.115
NetD64_C on Top Layer "NONET_L-01_P-001" (solid, remove dead copper, pour order 20): 329.298,-3.185 329.298,-2.789 339.288,-2.789 339.288,-6.12 329.306,-6.12 329.301,-6.115
NetD63_C on Top Layer "NONET_L-01_P-001" (solid, remove dead copper, pour order 19): 317.432,-3.185 317.432,-2.789 328.693,-2.789 328.712,-2.808 328.712,-6.12 317.44,-6.12 317.435,-6.115
NetD62_C on Top Layer "NONET_L-01_P-001" (solid, remove dead copper, pour order 18): 305.566,-3.185 305.566,-2.789 316.827,-2.789 316.846,-2.808 316.846,-6.12 305.574,-6.12 305.569,-6.115
NetD58_C on Top Layer "NONET_L-01_P-001" (solid, remove dead copper, pour order 17): 279.698,-3.185 279.698,-2.789 289.688,-2.789 289.688,-6.12 279.706,-6.12 279.701,-6.115
NetD57_C on Top Layer "NONET_L-01_P-001" (solid, remove dead copper, pour order 16): 267.832,-3.185 267.832,-2.789 279.093,-2.789 279.112,-2.808 279.112,-6.12 267.84,-6.12 267.835,-6.115
NetD56_C on Top Layer "NONET_L-01_P-001" (solid, remove dead copper, pour order 15): 255.966,-3.185 255.966,-2.789 267.227,-2.789 267.246,-2.808 267.246,-6.12 255.974,-6.12 255.969,-6.115
NetD47_C on Top Layer "NONET_L-01_P-001" (solid, remove dead copper, pour order 14): 230.098,-3.185 230.098,-2.789 240.088,-2.789 240.088,-6.12 230.106,-6.12 230.101,-6.115
NetD46_C on Top Layer "NONET_L-01_P-001" (solid, remove dead copper, pour order 13): 218.232,-3.185 218.232,-2.789 229.493,-2.789 229.512,-2.808 229.512,-6.12 218.24,-6.12 218.235,-6.115
NetD45_C on Top Layer "NONET_L-01_P-001" (solid, remove dead copper, pour order 12): 206.366,-3.185 206.366,-2.789 217.627,-2.789 217.646,-2.808 217.646,-6.12 206.374,-6.12 206.369,-6.115
NetD41_C on Top Layer "NONET_L-01_P-001" (solid, remove dead copper, pour order 11): 180.498,-3.185 180.498,-2.789 190.488,-2.789 190.488,-6.12 180.506,-6.12 180.501,-6.115
NetD40_C on Top Layer "NONET_L-01_P-001" (solid, remove dead copper, pour order 10): 168.632,-3.185 168.632,-2.789 179.893,-2.789 179.912,-2.808 179.912,-6.12 168.64,-6.12 168.635,-6.115
NetD39_C on Top Layer "NONET_L-01_P-001" (solid, remove dead copper, pour order 9): 156.766,-3.185 156.766,-2.789 168.027,-2.789 168.046,-2.808 168.046,-6.12 156.774,-6.12 156.769,-6.115
NetD30_C on Top Layer "NONET_L-01_P-001" (solid, remove dead copper, pour order 8): 130.898,-3.185 130.898,-2.789 140.888,-2.789 140.888,-6.12 130.906,-6.12 130.901,-6.115
NetD29_C on Top Layer "NONET_L-01_P-001" (solid, remove dead copper, pour order 7): 119.032,-3.185 119.032,-2.789 130.293,-2.789 130.312,-2.808 130.312,-6.12 119.04,-6.12 119.035,-6.115
NetD28_C on Top Layer "NONET_L-01_P-001" (solid, remove dead copper, pour order 6): 107.166,-3.185 107.166,-2.789 118.427,-2.789 118.446,-2.808 118.446,-6.12 107.174,-6.12 107.169,-6.115
NetD14_C on Top Layer "NONET_L-01_P-001" (solid, remove dead copper, pour order 5): 81.298,-3.185 81.298,-2.789 91.288,-2.789 91.288,-6.12 81.306,-6.12 81.301,-6.115
NetD13_C on Top Layer "NONET_L-01_P-001" (solid, remove dead copper, pour order 4): 69.432,-3.185 69.432,-2.789 80.693,-2.789 80.712,-2.808 80.712,-6.12 69.44,-6.12 69.435,-6.115
NetD12_C on Top Layer "NONET_L-01_P-001" (solid, remove dead copper, pour order 3): 57.566,-3.185 57.566,-2.789 68.827,-2.789 68.846,-2.808 68.846,-6.12 57.574,-6.12 57.569,-6.115
NetD3_C on Top Layer "NONET_L-01_P-001" (solid, remove dead copper, pour order 2): 31.698,-3.185 31.698,-2.789 41.688,-2.789 41.688,-6.12 31.706,-6.12 31.701,-6.115
NetD2_C on Top Layer "NONET_L-01_P-001" (solid, remove dead copper, pour order 1): 19.832,-3.185 19.832,-2.789 31.093,-2.789 31.112,-2.808 31.112,-6.12 19.84,-6.12 19.835,-6.115
NetD1_C on Top Layer "NONET_L-01_P-001" (solid, remove dead copper, pour order 0): 7.966,-3.185 7.966,-2.789 19.227,-2.789 19.246,-2.808 19.246,-6.12 7.974,-6.12 7.969,-6.115

## Keep-outs
Keep-Out Layer:
  the board outline again, w0.1

## Silkscreen, mask and mechanical layers (free items; w line width, h text height)
Top Overlay:
  text "www.tissaphern.com" at 233.094,-9.926 h4